# EAGLE board Force sensor and LCD PCB (EAGLE 9.7.0)
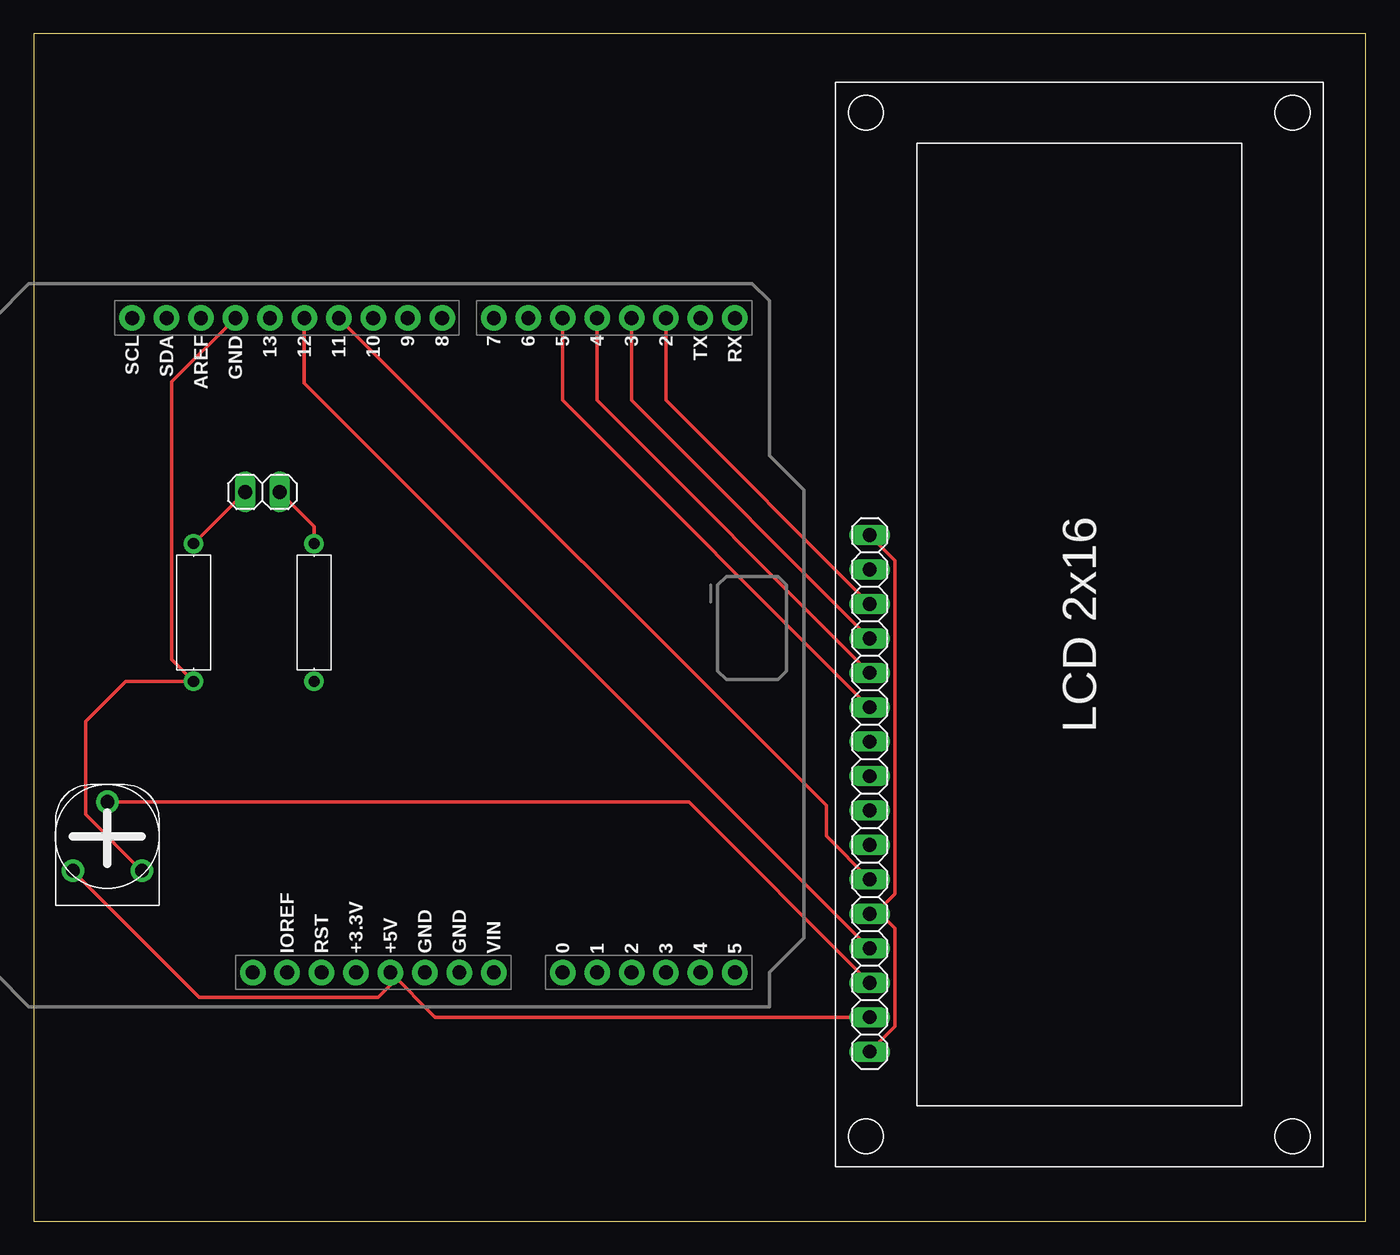
[diagram p0: board, top side]
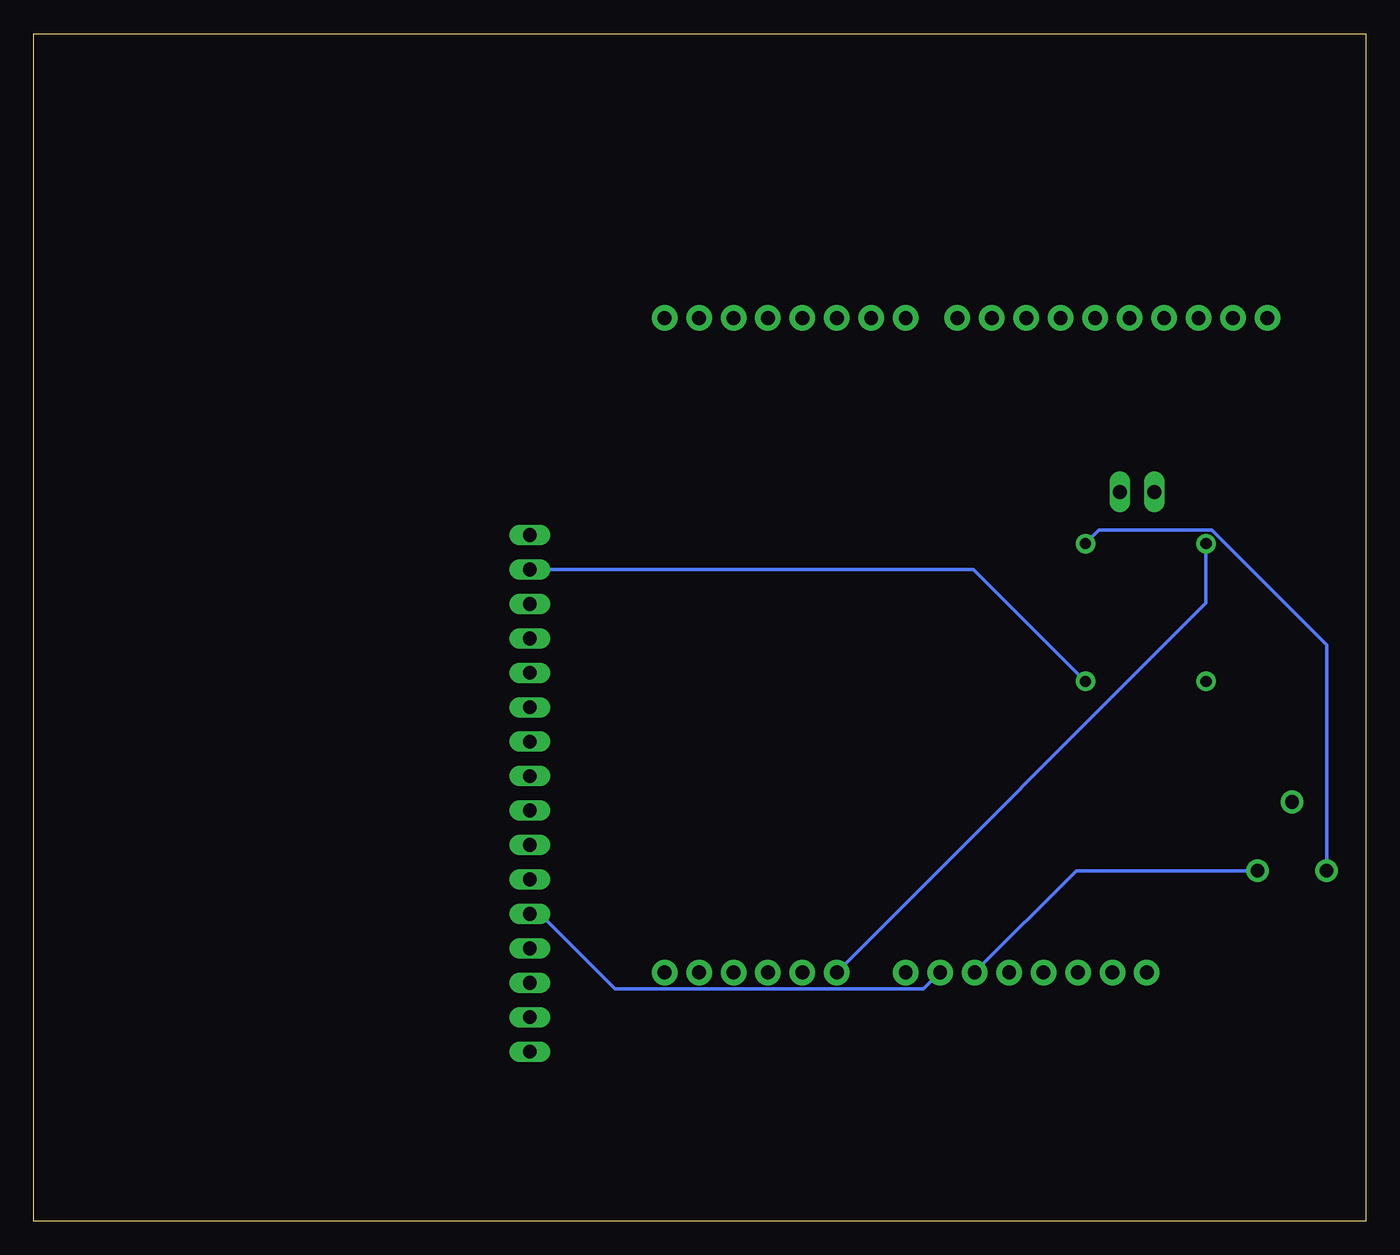
[diagram p1: board, bottom side, seen from below]

Size 98.21 x 87.56 mm. Coordinates in mm from the lower left corner, seen from the top.
Outline: 0,0 98.21,0 98.21,87.56 0,87.56 0,0
Copper layers (1*16): Top 0.035mm / dielectric 1.5mm / Bottom 0.035mm
Design rules "default": minimum track width 6mil, minimum drill 0.35mm, track to track 6mil, track to pad 6mil, pad to pad 6mil, via to via 6mil, smd to smd 6mil, copper to edge 40mil, drill to drill 6mil, minimum pad ring 10mil, minimum via ring 8mil, stop-mask expansion 4mil, vias tented up to drill 0mil, thermal gap 10mil

## Footprints (pad centres in the part's own frame; a part is rotated, then mirrored left to right if it is on the bottom)
RESAD1016W63L850D250B = drill 0.83 pad 1.43: 1 -5.08,0; 2 5.08,0
1X02 = drill 1.016 long: 1 -1.27,0; 2 1.27,0
HA-06-SM065 = drill 1 pad 1.676: 1 -2.54,-2.54; 2 0,2.54; 3 2.54,-2.54
ARDUINO-UNO-R3-SHIELD = drill 1.016 pad 1.88: 3.3V 24.13,-2.54; 5V 24.13,0; A0 24.13,12.7; A1 24.13,15.24; A2 24.13,17.78; A3 24.13,20.32; A4 24.13,22.86; A5 24.13,25.4; AREF -24.13,-13.97; D2 -24.13,20.32; D3 -24.13,17.78; D4 -24.13,15.24; D5 -24.13,12.7; D6 -24.13,10.16; D7 -24.13,7.62; D8 -24.13,3.81; D9 -24.13,1.27; D10 -24.13,-1.27; D11 -24.13,-3.81; D12 -24.13,-6.35; D13 -24.13,-8.89; GND@0 24.13,2.54; GND@1 24.13,5.08; GND@2 -24.13,-11.43; IOREF 24.13,-7.62; NC 24.13,-10.16; RES 24.13,-5.08; RX -24.13,25.4; SCL -24.13,-19.05; SDA -24.13,-16.51; TX -24.13,22.86; VIN 24.13,7.62
JHD-162A = drill 1.016 long: 1 -19.05,0; 2 -16.51,0; 3 -13.97,0; 4 -11.43,0; 5 -8.89,0; 6 -6.35,0; 7 -3.81,0; 8 -1.27,0; 9 1.27,0; 10 3.81,0; 11 6.35,0; 12 8.89,0; 13 11.43,0; 14 13.97,0; 15 16.51,0; 16 19.05,0

## Placement (x,y rotation side)
R1  220  [RESAD1016W63L850D250B]  20.66,44.89 270 top
R2  FORCE-SENSOR  [1X02]  16.85,53.78 0 top
R3  1k  [RESAD1016W63L850D250B]  11.77,44.89 90 top
RPOT1  250k  [HA-06-SM065]  5.42,28.38 0 top
U1  ARDUINO-UNO-R3-SHIELD  [ARDUINO-UNO-R3-SHIELD]  26.29,42.47 270 top
U2  LCD-16X2JHD-162A  [JHD-162A]  61.64,31.55 90 top

## Library data of the parts
R1-R3 RPOT1 U1 U2 = Tinkercad

## Nets
S$1: R3.1 RPOT1.3 U1.GND@0 U1.GND@2
U1_5V: R1.1 R2.2 RPOT1.1 U1.5V U2.2
U1_A0: R2.1 R3.2 U1.A0
U1_D2: U1.D2 U2.14
U1_D3: U1.D3 U2.13
U1_D4: U1.D4 U2.12
U1_D5: U1.D5 U2.11
U1_D11: U1.D11 U2.6
U1_D12: U1.D12 U2.4
U1_GND: U1.GND@1 U2.1 U2.5 U2.16
U2_LED+: R1.2 U2.15
U2_VO: RPOT1.2 U2.3

## Tracks (layer width: path | path; a pad name or v marks a point on that pad's centre or on a via)
S$1
  Top 0.254: U1.GND@2 10.16,61.9 10.16,41.42 R3.1 6.79,39.8 3.81,36.83 3.81,29.99 RPOT1.3
  Bottom 0.254: U1.GND@0 21.34,25.84 RPOT1.3
U1_5V
  Top 0.254: RPOT1.1 12.21,16.51 25.4,16.51 26.29,17.41 U1.5V 29.6,15.04 U2.2 | R2.2 20.66,51.23 R1.1
  Bottom 0.254: R1.1 19.67,50.96 11.36,50.96 2.88,42.48 RPOT1.1
U1_A0
  Top 0.254: R3.2 R2.1
  Bottom 0.254: R3.2 11.77,45.57 U1.A0
U1_D2
  Top 0.254: U1.D2 46.61,60.54 U2.14
U1_D3
  Top 0.254: U1.D3 44.08,60.54 U2.13
U1_D4
  Top 0.254: U1.D4 41.53,60.54 U2.12
U1_D5
  Top 0.254: U1.D5 39,60.54 U2.11
U1_D11
  Top 0.254: U1.D11 58.43,30.65 58.43,28.4 U2.6
U1_D12
  Top 0.254: U1.D12 19.94,61.81 U2.4
U1_GND
  Top 0.254: U2.16 63.5,48.73 63.5,24.13 62.03,22.66 U2.5 62.43,22.66 63.5,21.59 63.5,14.36 U2.1
  Bottom 0.254: U2.5 60.87,22.66 55.34,17.12 32.59,17.12 U1.GND@1
U2_LED+
  Bottom 0.254: U2.15 60.87,48.06 28.91,48.06 R1.2
U2_VO
  Top 0.254: RPOT1.2 48.3,30.91 U2.3